# Altium PCB PCB1.PcbDoc
Units mm, origin at the board's own origin, x right, y up, seen from the top; angles counter-clockwise.
Board outline 59.82 x 65.23 mm, 2 copper layers (Top Layer, Bottom Layer); 87 components, 78 nets, 361 pads, 104 vias.
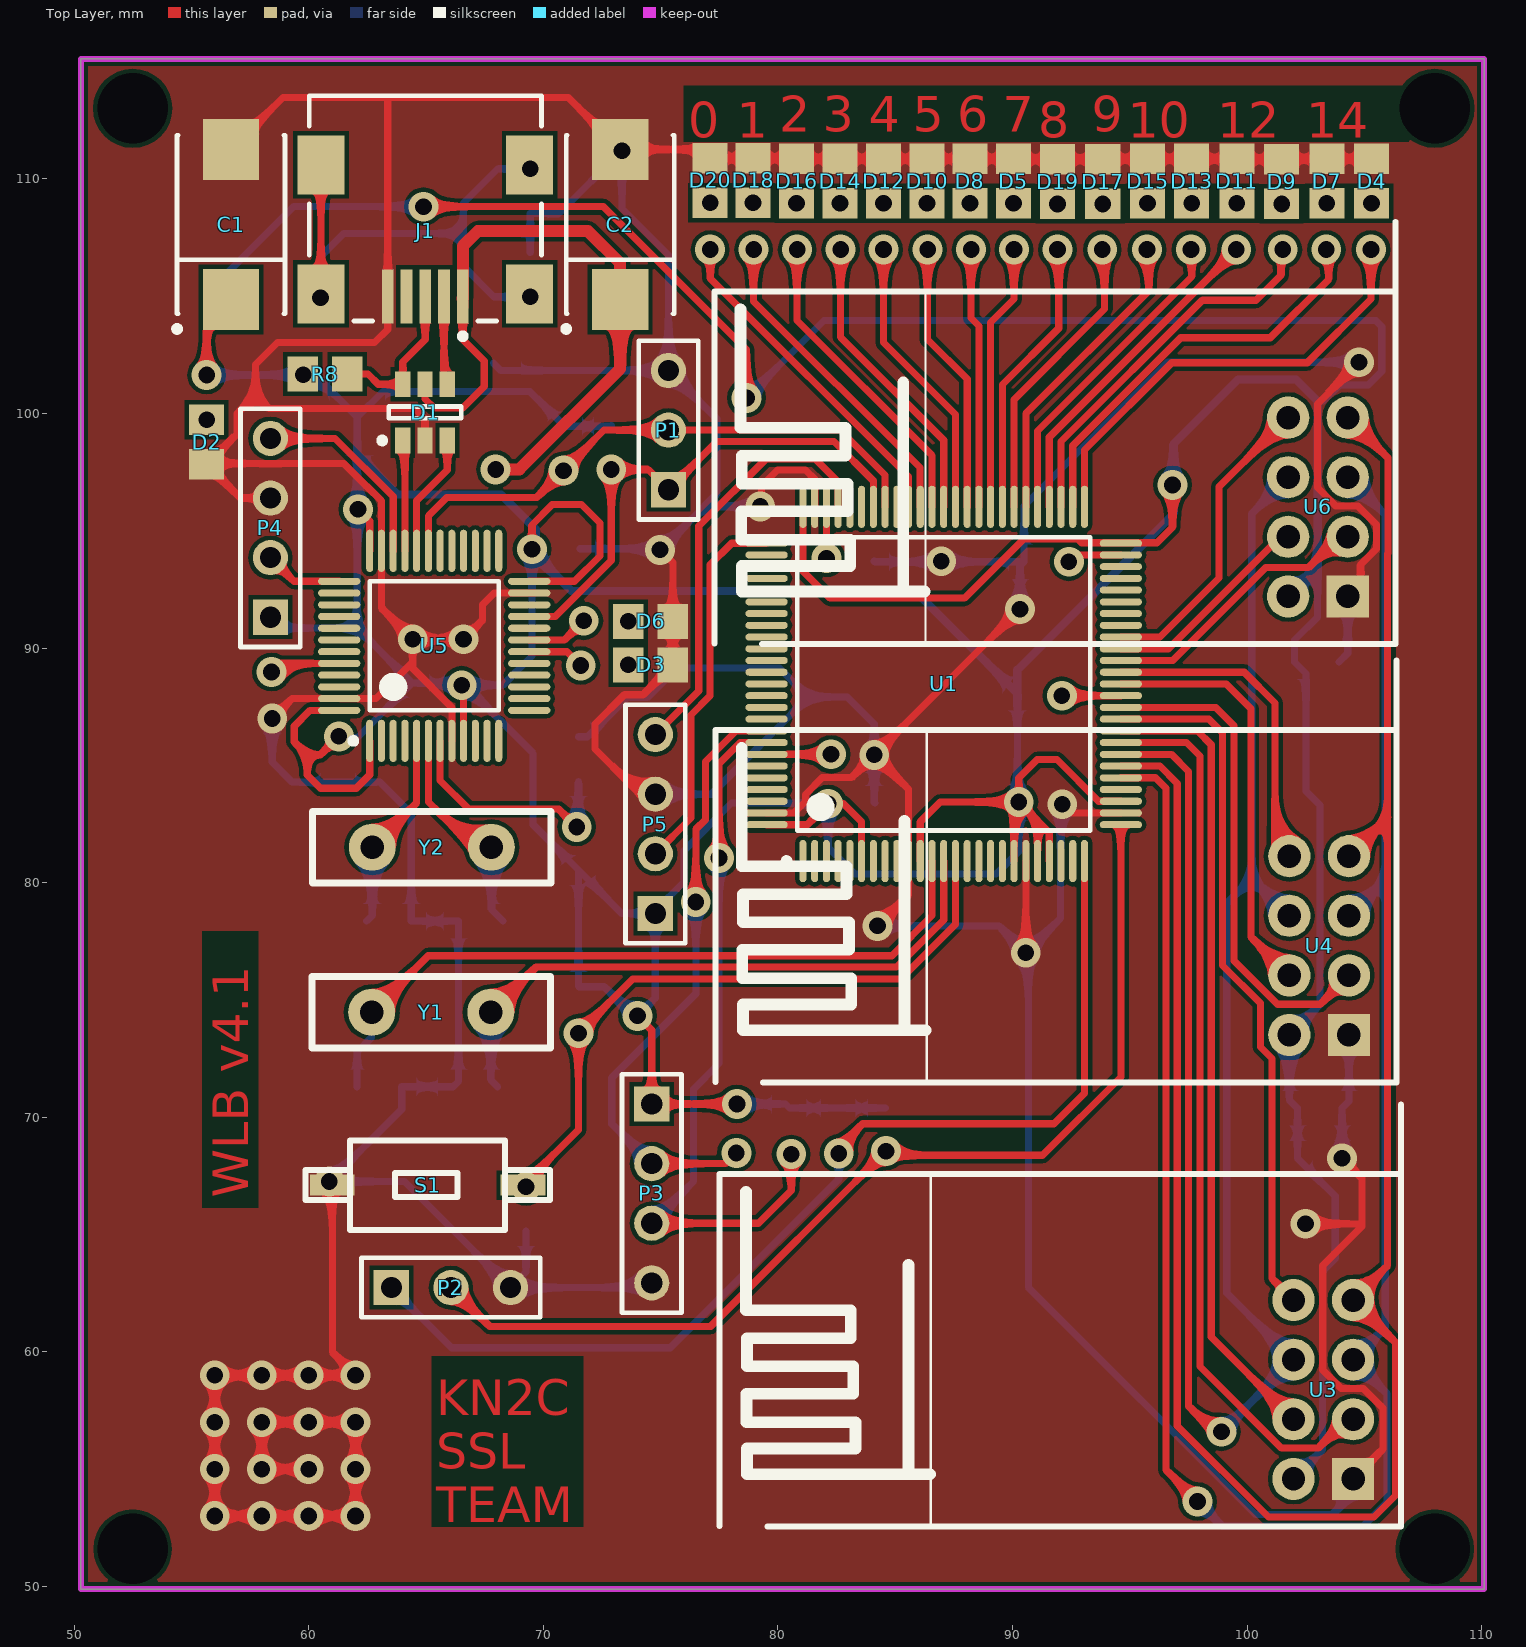
[diagram p0: Top Layer view]
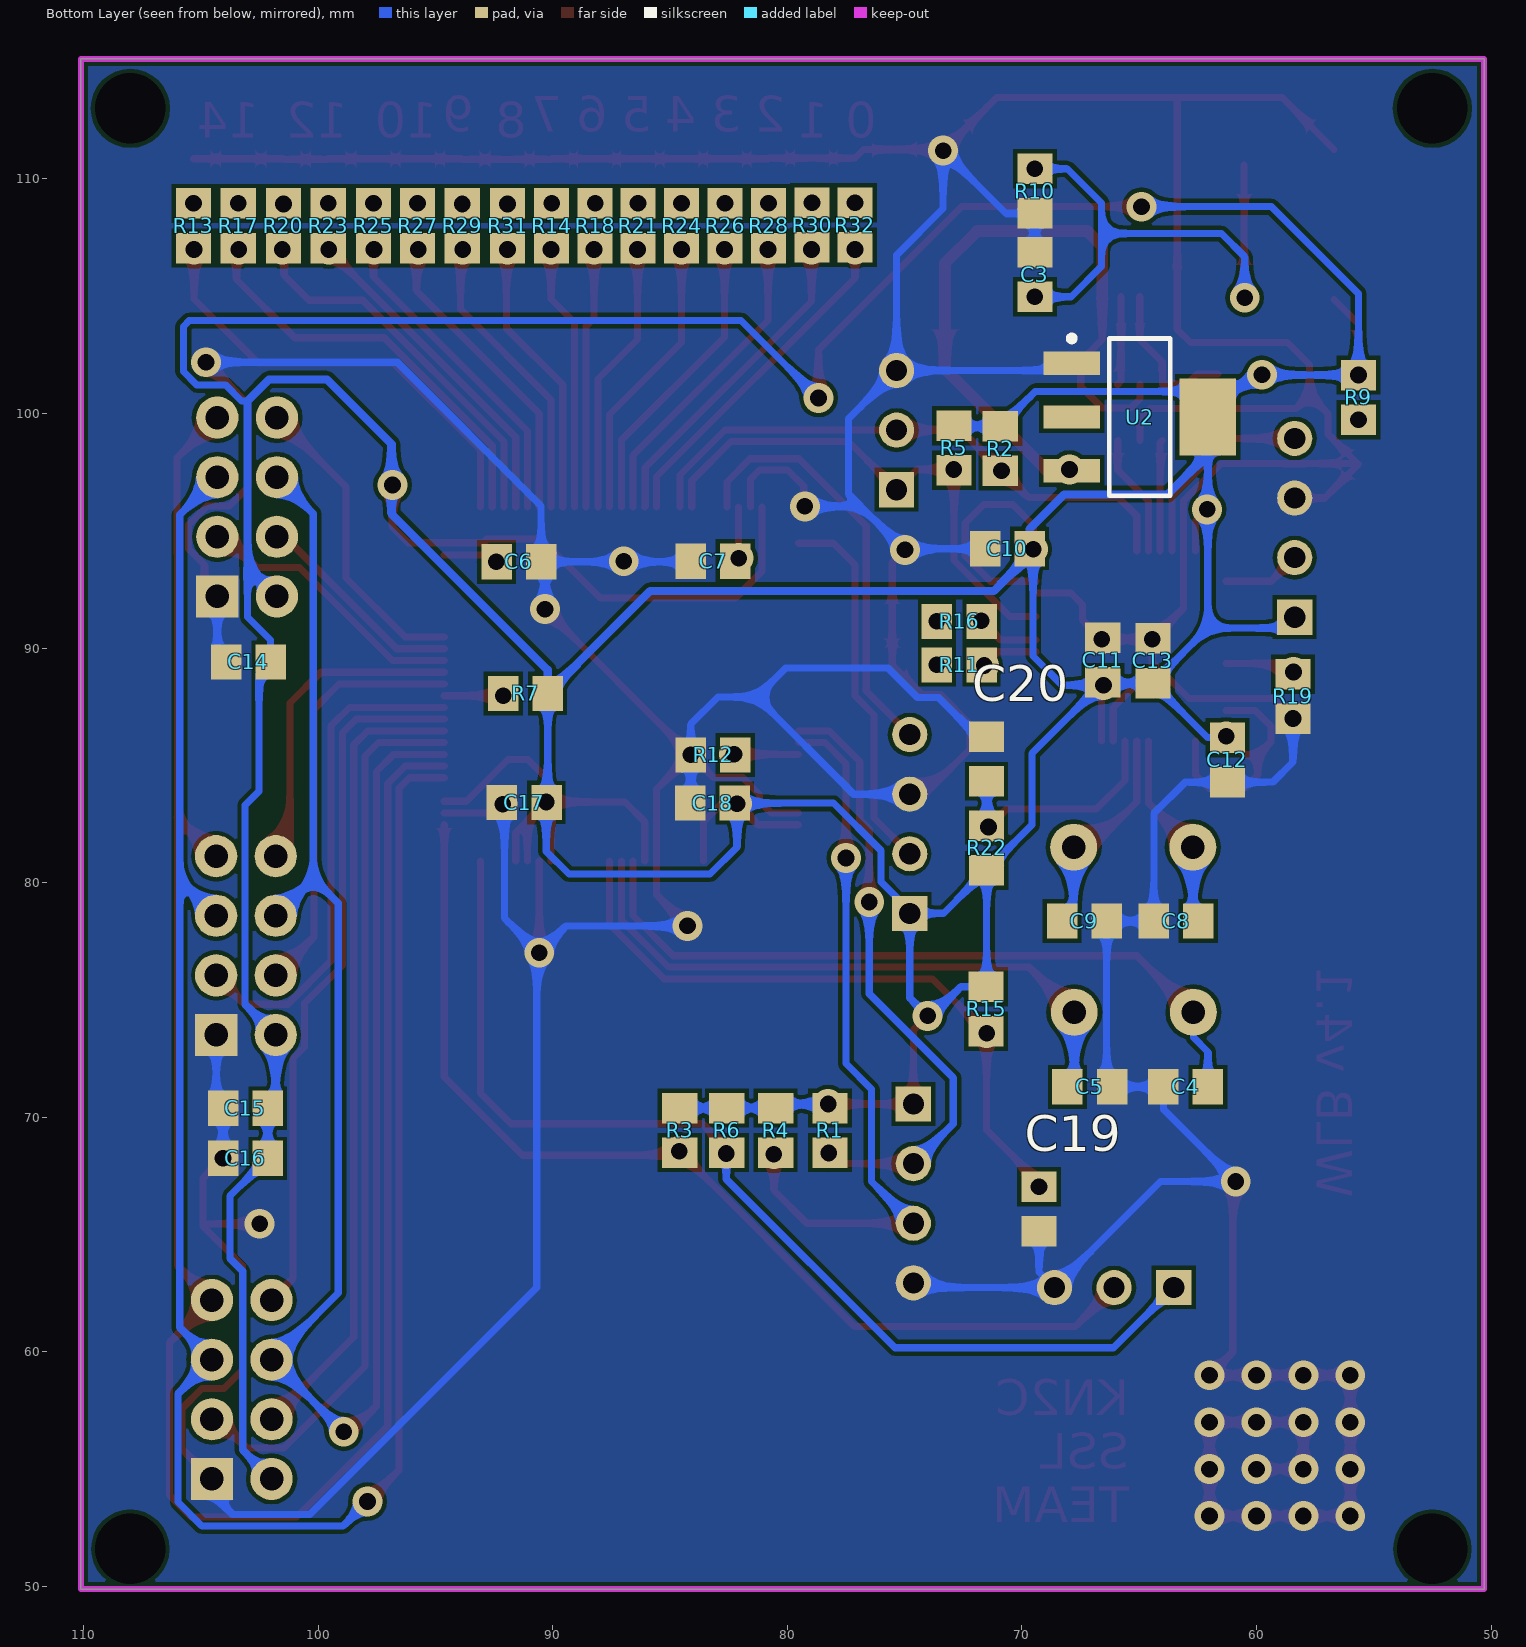
[diagram p1: Bottom Layer view, seen from below]

## Layer stack, top to bottom
Top Solder: solder mask 0.0102, Solder Resist, Dk 3.5
Top Layer: signal copper 0.0356
Dielectric 1: dielectric 0.32, FR-4, Dk 4.8
Bottom Layer: signal copper 0.0356
Bottom Solder: solder mask 0.0102, Solder Resist, Dk 3.5

## Board outline
50.292,49.886 110.109,49.886 110.109,115.113 50.292,115.113

## Design rules (kind name [scope] priority, off if disabled: settings)
Clearance [All] p1: gap=0.178
ComponentClearance [All] p1 off: gap=0.254 collisioncheckmode=3 verticalgap=0.254 showdistances=FALSE
Height [All] p1 off: minheight=0 maxheight=25.4 prefheight=12.7
PlaneConnect [All] p1: planeconnectstyle=Direct reliefexpansion=0.508 reliefentries=4 reliefconductorwidth=0.254 reliefairgap=0.254
PolygonConnect [All] p1: connectstyle=Direct reliefconductorwidth=0.254 reliefentries=4 polygonreliefangle="90 Angle" airgapwidth=0.254
RoutingVias [All] p1: holewidth=0.508 width=1.016 viastyle="Through Hole" minholewidth=0.406 minwidth=0.813 maxholewidth=0.508 maxwidth=1.016
SolderMaskExpansion [All] p1: expansion=0.102
Width [All] p1: maxlimit=0.508 minlimit=0.305 preferedwidth=0.305
27 further rules are at their usual default settings.

## Components (designator, comment, footprint, x,y, rotation, side; value= is the part's Value field where it differs from the comment)
C1 "Cap_El" 7343 56.693,108.052 r90 top
C2 "Cap_El" 7343 73.279,108.052 r90 top
C3 "Cap_UP" 2012[0805] 69.444,105.918 r270 bottom
C4 "Cap_UP" 2012[0805] 63.017,71.298 r0 bottom
C5 "Cap_UP" 2012[0805] 67.107,71.298 r180 bottom
C6 "Cap_UP" 2012[0805] 91.44,93.675 r0 bottom
C7 "Cap_UP" 2012[0805] 83.16,93.701 r180 bottom
C8 "Cap_UP" 2012[0805] 63.424,78.359 r0 bottom
C9 "Cap_UP" 2012[0805] 67.335,78.359 r180 bottom
C10 "Cap_UP" 2012[0805] 70.612,94.234 r180 bottom
C11 "Cap_UP" 2012[0805] 66.548,89.484 r270 bottom
C12 "Cap_UP" 2012[0805] 61.239,85.232 r90 bottom
C13 "Cap_UP" 2012[0805] 64.414,89.459 r270 bottom
C14 "Cap_UP" 2012[0805] 102.972,89.408 r180 bottom
C15 "Cap_UP" 2012[0805] 103.099,70.383 r180 bottom
C16 "Cap_UP" 2012[0805] 103.099,68.25 r180 bottom
C17 "Cap_UP" 2012[0805] 91.211,83.414 r180 bottom
C18 "Cap_UP" 2012[0805] 83.185,83.388 r180 bottom
C19 "Cap_UP" 2012[0805] 69.266,66.091 r90 bottom
C20 "Cap_UP" 2012[0805] 71.501,85.268 r270 bottom
D1 "PRTR5V0U2X" PRTR5V0U2D 64.999,100.051 r180 top
D2 "Diode" 2012[0805] 55.651,98.781 r270 top
D3 "Diode" 2012[0805] 74.574,89.281 r0 top
D4 "Diode" 2012[0805] 105.308,109.906 r90 top
D5 "Diode" 2012[0805] 90.043,109.906 r90 top
D6 "Diode" 2012[0805] 74.574,91.135 r0 top
D7 "Diode" 2012[0805] 103.403,109.906 r90 top
D8 "Diode" 2012[0805] 88.189,109.906 r90 top
D9 "Diode" 2012[0805] 101.473,109.88 r90 top
D10 "Diode" 2012[0805] 86.36,109.906 r90 top
D11 "Diode" 2012[0805] 99.568,109.906 r90 top
D12 "Diode" 2012[0805] 84.506,109.906 r90 top
D13 "Diode" 2012[0805] 97.638,109.906 r90 top
D14 "Diode" 2012[0805] 82.652,109.906 r90 top
D15 "Diode" 2012[0805] 95.758,109.906 r90 top
D16 "Diode" 2012[0805] 80.797,109.906 r90 top
D17 "Diode" 2012[0805] 93.853,109.88 r90 top
D18 "Diode" 2012[0805] 78.943,109.931 r90 top
D19 "Diode" 2012[0805] 91.923,109.88 r90 top
D20 "Diode" 2012[0805] 77.114,109.931 r90 top
J1 "USB_AB" USB_MINI 64.973,108.941 r180 top
P1 "Header 3" HDR1X3 75.336,96.749 r90 top
P2 "Header 3" HDR1X3 63.525,62.738 r0 top
P3 "Header 4" HDR1X4 74.625,70.561 r270 top
P4 "Header 4" HDR1X4 58.369,91.313 r90 top
P5 "Header 4" HDR1X4 74.778,78.689 r90 top
R1 "Res" 2012[0805] 78.181,69.444 r270 bottom
R2 "Res" 2012[0805] 70.917,98.501 r270 bottom
R3 "Res" 2012[0805] 84.582,69.444 r270 bottom
R4 "Res" 2012[0805] 80.493,69.444 r270 bottom
R5 "Res" 2012[0805] 72.898,98.527 r270 bottom
R6 "Res" 2012[0805] 82.575,69.444 r270 bottom
R7 "Res" 2012[0805] 91.161,88.062 r0 bottom
R8 "Res" 2012[0805] 60.696,101.676 r0 top
R9 "Res" 2012[0805] 55.651,100.686 r270 bottom
R10 "1M" 2012[0805] 69.444,109.474 r90 bottom
R11 "Res" 2012[0805] 72.669,89.281 r0 bottom
R12 "Res" 2012[0805] 83.16,85.446 r0 bottom
R13 "Res" 2012[0805] 105.308,108.001 r90 bottom
R14 "Res" 2012[0805] 90.043,108.001 r90 bottom
R15 "Res" 2012[0805] 71.526,74.615 r270 bottom
R16 "Res" 2012[0805] 72.669,91.135 r0 bottom
R17 "Res" 2012[0805] 103.403,108.001 r90 bottom
R18 "Res" 2012[0805] 88.189,108.001 r90 bottom
R19 "Res" 2012[0805] 58.445,87.935 r270 bottom
R20 "Res" 2012[0805] 101.473,108.001 r90 bottom
R21 "Res" 2012[0805] 86.36,108.001 r90 bottom
R22 "Res" 2012[0805] 71.501,81.483 r90 bottom
R23 "Res" 2012[0805] 99.568,108.001 r90 bottom
R24 "Res" 2012[0805] 84.506,108.001 r90 bottom
R25 "Res" 2012[0805] 97.638,108.001 r90 bottom
R26 "Res" 2012[0805] 82.652,108.001 r90 bottom
R27 "Res" 2012[0805] 95.758,108.001 r90 bottom
R28 "Res" 2012[0805] 80.797,108.001 r90 bottom
R29 "Res" 2012[0805] 93.853,108.001 r90 bottom
R30 "Res" 2012[0805] 78.943,108.026 r90 bottom
R31 "Res" 2012[0805] 91.923,108.001 r90 bottom
R32 "Res" 2012[0805] 77.114,108.026 r90 bottom
S1 "SW-SPST" SW-SMD 65.075,67.107 r180 top
U1 "STM32F407VGT6" STM-LQFP100_N 87.071,88.468 r90 top
U2 "LM1117DT-3.3" SOT223 64.973,99.847 r180 bottom
U3 "nrf24L01" NRF24L01 106.553,52.553 r180 top
U4 "nrf24L01" NRF24L01 106.375,71.476 r180 top
U5 "STM32F103CBT6" STM-LQFP48_N 65.354,90.094 r90 top
U6 "nrf24L01" NRF24L01 106.324,90.17 r180 top
Y1 "XTAL" XTALL 65.227,74.473 r270 top
Y2 "XTAL" XTALL 65.253,81.509 r90 top

## Footprints (in the part's own frame and the unit in brackets; to place one, negate y for a bottom-side part, rotate by r counter-clockwise, add the part's x,y. Pads: shape width x height; smd on the part's side, far side on the other; paste and mask are expansions set on the pad)
2012[0805] [mm] "Chip Resistor; Body 2.0 x 1.3 mm (LxW typ)"
  rect 1.3x1.5 smd: 1(-0.95,0) 2(0.95,0)
  body extent -1.22,-0.75 1.28,0.75, height 0.5
7343 [mm] "Capacitor, SM Tantalum; Body 7.3 x 4.3 mm (LxW typ)"
  rect 2.6x2.4 smd: 1(-3.2,0) 2(3.2,0)
  silkscreen extent -4.57,-2.3 3.8,2.42, body extent -3.9,-2.4 3.9,2.4, height 2
HDR1X3 [mm] "Connector; Header; 3 Position"
  rect 1.5x1.5 hole 0.9: 1(0,0)
  round 1.5 hole 0.9: 2(2.54,0) 3(5.08,0)
  silkscreen extent -1.27,-1.27 6.35,1.27
HDR1X4 [mm] "Connector; Header; 4 Position"
  rect 1.5x1.5 hole 0.9: 1(0,0)
  round 1.5 hole 0.9: 2(2.54,0) 3(5.08,0) 4(7.62,0)
  silkscreen extent -1.27,-1.27 8.89,1.27
NRF24L01 [mm]
  rect 1.8x1.8 hole 1: 1(2.032,-2.032)
  round 1.8 hole 1: 2(4.572,-2.032) 3(2.032,-4.572) 4(4.572,-4.572) 5(2.032,-7.112) 6(4.572,-7.112) 7(2.032,-9.652) 8(4.572,-9.652)
  silkscreen extent 0,-18 29.03,0
PRTR5V0U2D [mm]
  rect 0.65x1.1 smd: 1(0.987,1.204) 2(0.037,1.204) 3(-0.913,1.204) 4(-0.913,-1.196) 5(0.037,-1.196) 6(0.987,-1.196)
  silkscreen extent -1.51,-0.25 1.99,1.33, body extent -1.51,-0.9 1.59,0.9, height 1.1
SOT223 [mm] "SOT223, 4-Leads, Body 6.7x7.3mm (max), Pitch 2.30mm, IPC Medium Density"
  rect 2.4x1 smd: 1(-2.9,2.3) 2(-2.9,0) 3(-2.9,-2.3)
  rect 2.4x3.3 smd: 4(2.9,0)
  silkscreen extent -3.03,-3.35 1.3,3.47, body extent -1.85,-3.35 1.85,3.35, height 1.8
STM-LQFP48_N [mm] "QFP, 48-Leads, Body 7x7mm, Pitch 0.5mm, IPC Medium Density"
  oval 1.8x0.3 smd: 1(-4.05,2.75) 2(-4.05,2.25) 3(-4.05,1.75) 4(-4.05,1.25) 5(-4.05,0.75) 6(-4.05,0.25) 7(-4.05,-0.25) 8(-4.05,-0.75) 9(-4.05,-1.25) 10(-4.05,-1.75) 11(-4.05,-2.25) 12(-4.05,-2.75) 25(4.05,-2.75) 26(4.05,-2.25) 27(4.05,-1.75) 28(4.05,-1.25) 29(4.05,-0.75) 30(4.05,-0.25) 31(4.05,0.25) 32(4.05,0.75) 33(4.05,1.25) 34(4.05,1.75) 35(4.05,2.25) 36(4.05,2.75)
  oval 0.3x1.8 smd: 13(-2.75,-4.05) 14(-2.25,-4.05) 15(-1.75,-4.05) 16(-1.25,-4.05) 17(-0.75,-4.05) 18(-0.25,-4.05) 19(0.25,-4.05) 20(0.75,-4.05) 21(1.25,-4.05) 22(1.75,-4.05) 23(2.25,-4.05) 24(2.75,-4.05) 37(2.75,4.05) 38(2.25,4.05) 39(1.75,4.05) 40(1.25,4.05) 41(0.75,4.05) 42(0.25,4.05) 43(-0.25,4.05) 44(-0.75,4.05) 45(-1.25,4.05) 46(-1.75,4.05) 47(-2.25,4.05) 48(-2.75,4.05)
  silkscreen extent -4.17,-2.75 2.75,3.57, body extent -3.5,-3.5 3.5,3.5, height 1.6
STM-LQFP100_N [mm] "Thin QFP, 100-Leads, Body 14x14mm, Pitch 0.5mm, IPC Medium Density"
  oval 1.8x0.3 smd: 1(-7.55,6) 2(-7.55,5.5) 3(-7.55,5) 4(-7.55,4.5) 5(-7.55,4) 6(-7.55,3.5) 7(-7.55,3) 8(-7.55,2.5) 9(-7.55,2) 10(-7.55,1.5) 11(-7.55,1) 12(-7.55,0.5) 13(-7.55,0) 14(-7.55,-0.5) 15(-7.55,-1) 16(-7.55,-1.5) 17(-7.55,-2) 18(-7.55,-2.5) 19(-7.55,-3) 20(-7.55,-3.5) 21(-7.55,-4) 22(-7.55,-4.5) 23(-7.55,-5) 24(-7.55,-5.5) 25(-7.55,-6) 51(7.55,-6) 52(7.55,-5.5) 53(7.55,-5) 54(7.55,-4.5) 55(7.55,-4) 56(7.55,-3.5) 57(7.55,-3) 58(7.55,-2.5) 59(7.55,-2) 60(7.55,-1.5) 61(7.55,-1) 62(7.55,-0.5) 63(7.55,0) 64(7.55,0.5) 65(7.55,1) 66(7.55,1.5) 67(7.55,2) 68(7.55,2.5) 69(7.55,3) 70(7.55,3.5) 71(7.55,4) 72(7.55,4.5) 73(7.55,5) 74(7.55,5.5) 75(7.55,6)
  oval 0.3x1.8 smd: 26(-6,-7.55) 27(-5.5,-7.55) 28(-5,-7.55) 29(-4.5,-7.55) 30(-4,-7.55) 31(-3.5,-7.55) 32(-3,-7.55) 33(-2.5,-7.55) 34(-2,-7.55) 35(-1.5,-7.55) 36(-1,-7.55) 37(-0.5,-7.55) 38(0,-7.55) 39(0.5,-7.55) 40(1,-7.55) 41(1.5,-7.55) 42(2,-7.55) 43(2.5,-7.55) 44(3,-7.55) 45(3.5,-7.55) 46(4,-7.55) 47(4.5,-7.55) 48(5,-7.55) 49(5.5,-7.55) 50(6,-7.55) 76(6,7.55) 77(5.5,7.55) 78(5,7.55) 79(4.5,7.55) 80(4,7.55) 81(3.5,7.55) 82(3,7.55) 83(2.5,7.55) 84(2,7.55) 85(1.5,7.55) 86(1,7.55) 87(0.5,7.55) 88(0,7.55) 89(-0.5,7.55) 90(-1,7.55) 91(-1.5,7.55) 92(-2,7.55) 93(-2.5,7.55) 94(-3,7.55) 95(-3.5,7.55) 96(-4,7.55) 97(-4.5,7.55) 98(-5,7.55) 99(-5.5,7.55) 100(-6,7.55)
  silkscreen extent -7.67,-6.25 6.25,6.82, body extent -7,-7 7,7, height 1.6
SW-SMD [mil]
  rect 75x35 smd: 1(-160,0) 2(160,0)
  silkscreen extent -205,-75 205,75
USB_MINI [mm]
  rect 0.5x2.3 smd: 1(-1.6,3.95) 2(-0.8,3.95) 3(0,3.95) 4(0.8,3.95) 5(1.6,3.95)
  rect 2x2.5 smd: 6(4.45,3.85) 7(4.45,-1.65) 8(-4.45,3.85) 9(-4.45,-1.65)
  silkscreen extent -4.95,-4.6 4.95,5.77
XTALL [mm]
  round 2 hole 1: 1(0,-2.54) 2(0,2.54)
  silkscreen extent -1.52,-5.08 1.52,5.08

## Part data
C1 C2 C3 C4 C5 C6 C7 C8 C9 C10 C11 C12 C13 C14 C15 C16 C17 C18 C19 C20: "Capacitor"
D1: "Double rail-to-rail USB ESD protection diode"
D2 D3 D4 D5 D6 D7 D8 D9 D10 D11 D12 D13 D14 D15 D16 D17 D18 D19 D20: "1 Amp General Purpose Rectifier"
J1: "Micro USB AB Connector"
P1 P2: "Header, 3-Pin"
P3 P4 P5: "Header, 4-Pin"
R1 R2 R3 R4 R5 R6 R7 R8 R9 R11 R12 R13 R14 R15 R16 R17 R18 R19 R20 R21 R22 R23 R24 R25 R26 R27 R28 R29 R30 R31 R32: "Semiconductor Resistor"
R10: library part Res, "Semiconductor Resistor"
S1: "Single-Pole, Single-Throw Switch"
U1: "ARM Cortex-M4 32-bit MCU+FPU, 210 DMIPS, 1024 kB Flash, 192 kB Internal RAM, 82 I/Os, 100-pin LQFP, -40 to 85 degC, Tray"
U2: "800mA Low-Dropout Linear Regulator, 3-pin TO-252"
U5: "ARM Cortex-M3 32-bit MCU, 128 KB Flash, 20 KB Internal RAM, 37 I/Os, 48-pin LQFP, -40 to 85 degC, Tray"
Y1 Y2: "Crystal Oscillator"

## Free pads (board coordinates)
  round 1.524 hole 3: 0(108,113) 1(108,51.6) 2(52.5,113) 3(52.5,51.6)

## Via types
v1: diameter 1.27, hole 0.711, Top Layer to Bottom Layer, 104 vias

## Nets (pads, with @x,y where several pads share a name; then routed paths per layer and width w, separated by ;. In a path a pad name is that pad's centre, name@x,y a point inside that pad or via, vN(x,y) a via of type N, cw(c..) or ccw(c..) an arc to the next point about the centre after c; other vN are vias at no path point)
3.3V: C1.1 C10.2 C11.2 C12.2 C13.2 C14.2 C15.2 C16.2 C17.2 C18.2 P3.1 P4.1 P5.1 R1.1 R2.1 R3.1 R4.1 R5.1 R6.1 R7.1 R8.1 R9.1 R15.1 R22.1 U1.6 U1.11 U1.19 U1.21 U1.22 U1.28 U1.50 U1.75 U1.100 U2.4 U3.2 U4.2 U5.1 U5.9 U5.24 U5.36 U5.48 U6.2 | length 366.3
  Top Layer w0.305: v1(55.651,101.636) 55.651,103.81 C1.1 ; v1(61.29,86.233) 60.503,85.446 59.944,85.446 ; U5.48 60.064,87.344 59.385,86.665 59.385,86.004 59.944,85.446 ; v1(62.103,95.91) 62.604,95.409 U5.36 ; U5.1 62.604,84.601 62.027,84.023 60.503,84.023 59.944,84.582 59.944,85.446 ; v1(64.897,108.814) 72.568,108.814 78.664,102.718 v1(78.664,100.66) ; v1(66.523,88.417) 66.604,88.336 U5.9 ; U5.24 71.333,92.844 72.415,93.926 72.415,95.326 71.628,96.114 70.383,96.114 69.52,95.25 v1(69.52,94.209) ; v1(74.016,74.32) 74.625,73.711 P3.1 v1(78.257,70.561) ; U1.100 81.249,82.468 v1(82.144,83.363) 82.804,83.363 83.571,82.596 U1.6 ; U1.75 81.071,93.274 82.22,92.126 87.96,92.126 90.475,94.64 92.805,94.64 92.957,94.488 96.164,94.488 96.825,95.148 v1(96.825,96.952) ; U1.11 86.071,82.591 86.919,83.439 v1(90.272,83.439) ; U1.19 90.071,83.239 v1(90.272,83.439) ; U1.21 91.071,82.639 ; U1.22 91.571,82.139 91.071,82.639 ; U1.28 93.671,83.468 91.897,85.242 91.059,85.242 90.272,84.455 v1(90.272,83.439) ; v1(90.272,83.439) 91.071,82.639
  Bottom Layer w0.305: P4.1 58.832,90.85 62.073,90.85 ; C12.2 62.088,86.182 C13.2 ; v1(64.897,108.814) 59.36,108.814 55.651,105.105 v1(55.651,101.636) 60.285,101.636 U2.4 ; v1(66.523,88.417) C11.2@66.665,88.417 ; v1(69.52,94.209) 69.52,89.662 68.275,88.417 C11.2@66.665,88.417 ; R5.1 72.873,99.451 R2.1 69.428,100.94 63.165,100.94 U2.4 ; v1(78.257,70.561) 80.325,70.561 R4.1 R6.1 R3.1 ; v1(78.664,100.66) 81.966,103.962 105.486,103.962 105.74,103.708 105.74,101.784 105.175,101.219 103.95,101.219 103.261,100.531 103.01,100.531 ; v1(82.144,83.363) 82.144,81.509 83.287,80.366 89.306,80.366 90.272,81.331 v1(90.272,83.439) ; C18.2 78.029,83.388 75.997,81.356 75.997,80.029 74.778,78.81 P5.1 ; R7.1 90.211,83.464 C17.2 ; U3.2 103.211,55.815 103.211,63.438 103.759,63.986 103.759,66.639 C16.2 C15.2 101.803,70.729 U4.2 103.113,74.817 103.113,83.298 102.514,83.896 102.514,88.915 C14.2 102.022,90.338 103.01,91.326 103.01,93.459 ; 62.073,90.85 C13.2 ; 62.073,90.85 62.073,98.262 U2.4 ; C13.2 66.523,88.509 C11.2 C11.2@66.665,88.417 ; C11.2@66.665,88.417 69.571,85.512 69.571,82.464 R22.1 ; R22.1 73.345,78.689 P5.1 ; R22.1 71.501,75.59 R15.1 72.593,75.565 73.838,74.32 v1(74.016,74.32) 74.778,75.082 P5.1
  Bottom Layer w0.356: U2.4@62.073,98.262 63.79,96.545 68.199,96.545 69.675,95.07 69.675,94.247 C10.2 69.662,93.965 71.196,92.431 85.842,92.431 R7.1 90.211,89.068 96.863,95.72 96.863,98.692 99.619,101.448 102.093,101.448 103.01,100.531 103.01,93.459 U6.2
  other v1: 59.766,101.651
5V: C2.1 D1.5 J1.1 U2.3 | length 29.2
  Top Layer w0.305: D1.5 64.962,100.621 65.354,100.228 66.573,100.228 67.488,101.143 67.488,102.235 66.573,103.15 J1.1
  Top Layer w0.508: J1.1 66.573,107.137 67.208,107.772 71.907,107.772 73.279,106.401 C2.1 73.279,101.905 68.986,97.612 v1(67.97,97.612)
CE1: U1.33 U3.3 | length 38.1
  Top Layer w0.305: U1.33 97.42,85.968 97.993,85.395 97.993,59.373 101.471,55.894 103.033,55.894 104.264,57.125 U3.3
CE2: U1.36 U4.3 | length 21.3
  Top Layer w0.305: U1.36 98.663,87.468 99.441,86.69 99.441,76.67 101.294,74.817 103.113,74.817 U4.3
CE3: U1.40 U6.3 | length 11.9
  Top Layer w0.305: U1.40 96.831,89.468 100.795,93.432 102.627,93.432 103.937,94.742 U6.3
CS1: U1.34 U3.4 | length 34.3
  Top Layer w0.305: U1.34 97.885,86.468 98.476,85.877 98.476,60.63 U3.4
CS2: U1.38 U4.4 | length 18
  Top Layer w0.305: U1.38 99.111,88.468 100.165,87.414 100.165,77.686 U4.4
CS3: U1.41 U6.4 | length 9.1
  Top Layer w0.305: U1.41 96.648,89.968 101.422,94.742 U6.4
"DEBUG RX": P2.2 R3.2 U1.26 | length 44.6
  Top Layer w0.305: P2.2 67.716,61.087 77.14,61.087 v1(84.607,68.555) ; v1@84.506,68.377 91.288,68.377 94.621,71.71 U1.26
"DEBUG TX": P2.1 R6.2 U1.25 | length 45.6
  Top Layer w0.305: v1@82.525,68.631 83.617,69.723 91.77,69.723 93.071,71.024 U1.25
  Bottom Layer w0.305: P2.1 66.091,60.173 75.413,60.173 82.601,67.361 v1(82.601,68.453)
DM: D1.3 U5.32 | length 5.2
  Top Layer w0.305: U5.32 64.604,96.278 65.912,97.585 D1.3
DP: D1.1 U5.33 | length 4.7
  Top Layer w0.305: D1.1 64.104,98.754 U5.33
GND: C1.2 C2.2 C3.1 C4.2 C5.2 C6.1 C7.1 C8.2 C9.2 C10.1 C11.1 C12.1 C13.1 C14.1 C15.1 C16.1 C17.1 C18.1 C19.1 C20.1 D1.2 D2.2 D3.2 D4.2 D5.2 D6.2 D7.2 D8.2 D9.2 D10.2 D11.2 D12.2 D13.2 D14.2 D15.2 D16.2 D17.2 D18.2 D19.2 D20.2 J1.5 P1.3 P2.3 P3.4 P4.3 P5.3 R10.1 R12.2 R19.2 S1.2 U1.10 U1.20 U1.27 U1.74 U1.99 U2.1 U3.1 U4.1 U5.8 U5.23 U5.35 U5.47 U6.1 | length 433.2
  Top Layer w0.305: C1.2 58.903,113.462 63.424,113.462 ; P4.3 57.089,96.393 D2.2 D2.2@55.687,97.866 ; v1(58.445,86.995) 59.294,87.844 U5.47 62.876,87.844 64.44,89.408 ; v1(60,55) v1(58,55) v1(58,57) v1(60,57) v1(62,57) v1(62,55) v1(62,53) v1(60,53) v1(58,53) v1(56,53) v1(56,55) v1(56,57) v1(56,59) v1(58,59) v1(60,59) v1(62,59) 61.011,59.989 S1.2 ; D1.2 64.962,99.783 64.541,100.203 58.318,100.203 57.734,100.787 ; U5.8 66.104,87.471 64.44,89.135 64.44,89.408 ; U5.23 67.909,92.344 67.412,91.846 67.412,91.186 v1(66.599,90.373) v1(64.44,90.373) ; P5.3 74.143,83.769 72.212,85.7 72.212,86.766 73.457,88.011 74.254,88.011 D3.2 D6.2 75.524,93.64 v1(74.981,94.183) ; v1@79.299,95.733 79.299,96.901 79.985,97.587 81.18,97.587 81.571,97.196 U1.74 ; U1.99 80.682,82.968 81.178,83.464 81.178,83.763 81.896,84.48 83.144,84.48 v1(84.11,85.446) ; v1(84.252,78.156) 85.571,79.475 U1.10 85.571,83.984 v1(84.11,85.446) ; v1(90.322,91.658) v1(84.11,85.446) ; v1(90.571,77.008) U1.20 ; v1(92.126,83.337) 92.495,82.968 U1.27 ; v1(102.489,65.456) 104.8,65.456 104.902,65.354 ; v1(104.049,68.25) 104.902,67.396 104.902,65.354 ; U6.1 104.837,92.746 104.837,93.547 105.523,94.232 105.523,95.252 104.722,96.052 103.783,96.052 102.997,96.838 102.997,100.406 v1(104.775,102.184) ; U3.1 105.791,55.855 105.791,57.594 104.951,58.434 104.011,58.434 103.226,59.22 103.226,63.678 104.902,65.354 ; D4.2 D7.2 101.498,110.856 D9.2 99.593,110.83 D11.2 D13.2 D15.2 93.878,110.856 D17.2 D19.2 90.068,110.83 D5.2 D8.2 D10.2 D12.2 D14.2 D16.2 80.772,110.881 D18.2 D20.2 76.744,111.252 C2.2 71.069,113.462 63.424,113.462 ; D2.2@55.687,97.866 57.908,97.866 57.922,97.853 58.817,97.853 58.83,97.866 61.497,97.866 62.487,96.876 62.503,96.876 63.104,96.274 U5.35 63.104,91.709 v1(64.44,90.373) ; D2.2@55.687,97.866 56.947,99.126 56.947,100 57.734,100.787 ; 57.734,100.787 57.734,102.083 58.674,103.022 62.814,103.022 63.373,103.581 J1.5 63.373,113.411 63.424,113.462 ; 64.44,89.408 v1(64.44,90.373)
  Bottom Layer w0.305: v1(58.445,86.995) R19.2 58.445,85.141 59.304,84.282 C12.1 63.038,84.282 64.374,82.946 C8.2 C9.2 66.385,71.526 C5.2 C4.2 63.967,70.343 v1(60.884,67.259) 64.084,67.259 P2.3 ; U2.1 68.192,101.829 P1.3 ; C19.1 69.266,63.398 P2.3 ; C3.1 R10.1 70.678,108.524 v1(73.355,111.201) 73.355,108.737 75.336,106.756 P1.3 ; C20.1 71.892,86.218 73.558,87.884 74.447,87.884 75.717,89.154 80.061,89.154 81.305,87.909 ; C10.1 75.057,94.234 76.86,96.037 ; P3.4 74.422,62.738 P2.3 ; P5.3 77.165,83.769 81.305,87.909 ; v1(79.248,96.037) 76.86,96.037 ; C7.1 84.135,93.675 C6.1 ; C18.1 84.11,83.414 v1(84.11,85.446) 84.11,86.756 82.956,87.909 81.305,87.909 ; v1(84.252,78.156) 89.423,78.156 v1(90.571,77.008) ; v1(90.322,91.658) 90.322,93.508 C6.1 ; v1(92.126,83.337) 92.05,83.261 92.05,78.486 v1(90.571,77.008) ; C14.1 104.292,89.779 U6.1 ; v1(104.049,68.25) C15.1 104.343,70.678 U4.1 ; U3.1 104.521,53.95 103.632,53.061 100.355,53.061 90.678,62.738 90.678,76.901 v1(90.571,77.008) ; v1(104.775,102.184) 96.622,102.184 90.49,96.053 C6.1 ; P1.3 77.394,99.771 77.394,96.571 76.86,96.037
  other v1: 86.97,93.701
IRQ1: U1.35 U3.8 | length 30
  Top Layer w0.305: U1.35 98.376,86.968 98.958,86.385 98.958,76.47 100.573,74.856 100.573,72.998 101.067,72.504 101.067,63.119 U3.8
IRQ2: U1.39 U4.8 | length 13.9
  Top Layer w0.305: U1.39 99.881,88.968 101.194,87.655 101.194,81.737 U4.8
IRQ3: U1.42 U6.8 | length 13.3
  Top Layer w0.305: U1.42 96.285,90.468 98.806,92.989 98.806,96.876 U6.8
LED1: R11.1 U5.18 | length 2.4
  Top Layer w0.305: U5.18 71.014,89.844 v1(71.603,89.256)
LED2: R16.1 U5.19 | length 2.7
  Top Layer w0.305: U5.19 70.913,90.344 v1(71.73,91.161)
MISO: U1.31 U3.7 U4.7 U6.7 | length 91.7
  Top Layer w0.305: U1.31 96.286,84.968 97.028,84.226 97.028,56.845 100.914,52.959 105.41,52.959 106.324,53.873 106.324,60.401 U3.7 105.994,63.678 105.994,82.779 ; U6.7 106.005,98.109 106.005,94.033 105.994,94.022 105.994,82.779 ; U4.7 105.994,82.779
MOSI: U1.32 U3.6 U4.6 U6.6 | length 78.6
  Top Layer w0.305: U1.32 96.777,85.468 97.511,84.734 97.511,57.683 98.603,56.591 v1(98.908,56.591)
  Bottom Layer w0.305: v1(98.908,56.591) U3.6 99.136,62.509 99.136,79.121 100.203,80.188 ; U6.6 100.203,95.733 100.203,80.188 ; U4.6 100.203,80.188
NetC3_2: C3.2 J1.6 J1.7 J1.8 J1.9 R10.2 | length 23.3
  Top Layer w0.305: J1.6 J1.7
  Bottom Layer w0.305: v1(60.503,104.927) 60.503,106.68 61.493,107.671 66.599,107.671 ; v1(69.444,104.968) 67.904,104.968 66.599,106.274 66.599,107.671 ; v1(69.444,110.424) 68.057,110.424 66.599,108.966 66.599,107.671
NetC4_1: C4.1 U1.12 Y1.1 | length 31.3
  Top Layer w0.305: Y1.1 65.1,76.886 84.861,76.886 86.571,78.596 U1.12
  Bottom Layer w0.305: C4.1 62.067,72.786 62.687,73.406 Y1.1
NetC5_1: C5.1 U1.13 Y1.2 | length 26.7
  Top Layer w0.305: Y1.2 69.698,76.403 85.065,76.403 87.071,78.41 U1.13
  Bottom Layer w0.305: Y1.2 67.767,71.587 C5.1
NetC6_2: C6.2 U1.49 | length 2.7
  Top Layer w0.305: v1@92.126,93.968 U1.49 ; v1@92.304,93.574 92.354,93.574 92.419,93.638 92.405,93.652 v1(92.405,93.675)
NetC7_2: C7.2 U1.73 | length 2.2
  Top Layer w0.305: v1(82.071,93.831) U1.73
NetC8_1: C8.1 U5.5 Y2.2 | length 8.6
  Top Layer w0.305: Y2.2 64.604,83.4 U5.5
  Bottom Layer w0.305: C8.1 62.713,78.598 Y2.2
NetC9_1: C9.1 U5.6 Y2.1 | length 9.4
  Top Layer w0.305: U5.6 65.104,83.435 67.031,81.509 Y2.1
  Bottom Layer w0.305: Y2.1 67.793,78.852 C9.1
NetC19_2: C19.2 R15.2 S1.1 U1.14 | length 28.1
  Top Layer w0.305: S1.1 71.501,69.469 v1(71.501,73.584) 73.812,75.895 85.242,75.895 87.571,78.224 U1.14
  other v1: 69.266,67.041
NetC20_2: C20.2 R22.2 U5.7 | length 10.3
  Top Layer w0.305: U5.7 65.604,84.357 66.827,83.134 70.663,83.134 v1(71.425,82.372)
  Bottom Layer w0.305: v1(71.425,82.372) 71.501,82.448 C20.2
NetD1_4: D1.4 J1.2 | length 3.8
  Top Layer w0.305: J1.2 65.773,101.385 D1.4
NetD1_6: D1.6 J1.3 R8.2 | length 6.7
  Top Layer w0.305: R8.2 62.535,101.676 62.964,101.247 D1.6 64.012,102.188 64.973,103.149 J1.3
NetD2_1: D2.1 R9.2
  other v1: 55.651,99.731
NetD3_1: D3.1 R11.2
  other v1: 73.624,89.281
NetD4_1: D4.1 R13.2
  other v1: 105.308,108.956
NetD5_1: D5.1 R14.2
  other v1: 90.043,108.956
NetD6_1: D6.1 R16.2
  other v1: 73.624,91.135
NetD7_1: D7.1 R17.2
  other v1: 103.403,108.956
NetD8_1: D8.1 R18.2
  other v1: 88.189,108.956
NetD9_1: D9.1 R20.2
  other v1: 101.473,108.93
NetD10_1: D10.1 R21.2
  other v1: 86.36,108.956
NetD11_1: D11.1 R23.2
  other v1: 99.568,108.956
NetD12_1: D12.1 R24.2
  other v1: 84.506,108.956
NetD13_1: D13.1 R25.2
  other v1: 97.638,108.956
NetD14_1: D14.1 R26.2
  other v1: 82.652,108.956
NetD15_1: D15.1 R27.2
  other v1: 95.758,108.956
NetD16_1: D16.1 R28.2
  other v1: 80.797,108.956
NetD17_1: D17.1 R29.2
  other v1: 93.853,108.93
NetD18_1: D18.1 R30.2
  other v1: 78.943,108.981
NetD19_1: D19.1 R31.2
  other v1: 91.923,108.93
NetD20_1: D20.1 R32.2
  other v1: 77.114,108.981
NetR7_2: R7.2 U1.37 | length 2.6
  Top Layer w0.305: v1@92.075,87.935 v1(92.108,87.968) U1.37
NetR12_1: R12.1 U1.94 | length 2.8
  Top Layer w0.305: U1.94 v1(82.268,85.468) v1@82.271,85.471
NetR19_1: R19.1 U5.44 | length 3.2
  Top Layer w0.305: v1@58.344,88.773 58.915,89.344 U5.44
  other v1: 58.42,88.976
RID0: R13.1 U1.51 | length 19.4
  Top Layer w0.305: U1.51 93.071,98.437 96.793,102.159 102.565,102.159 105.283,104.877 v1(105.283,106.985)
RID1: R17.1 U1.52 | length 17.8
  Top Layer w0.305: U1.52 92.571,98.62 97.177,103.226 100.99,103.226 103.48,105.715 103.48,106.883 v1(103.378,106.985)
RID2: R20.1 U1.53 | length 16.2
  Top Layer w0.305: U1.53 92.075,96.022 92.075,98.806 98.095,104.826 100.381,104.826 101.448,105.893 101.448,106.909 v1(101.524,106.985)
RID3: R23.1 U1.54 | length 14.3
  Top Layer w0.305: U1.54 91.571,98.988 99.543,106.959 v1(99.543,106.985)
RID4: R25.1 U1.55 | length 13.7
  Top Layer w0.305: U1.55 91.071,99.25 97.638,105.816 97.638,106.959 v1(97.612,106.985)
RID5: R27.1 U1.56 | length 13.2
  Top Layer w0.305: U1.56 90.571,99.995 95.809,105.232 95.809,106.909 v1(95.733,106.985)
RID6: R29.1 U1.57 | length 12.6
  Top Layer w0.305: U1.57 90.071,100.587 93.929,104.445 93.929,106.883 v1(93.828,106.985)
RID7: R31.1 U1.58 | length 12
  Top Layer w0.305: U1.58 89.571,101.23 91.973,103.632 91.973,106.934 v1(91.923,106.985)
RID8: R14.1 U1.59 | length 11.4
  Top Layer w0.305: U1.59 89.071,103.879 90.068,104.877 v1(90.068,106.985)
RID9: R18.1 U1.60 | length 11.1
  Top Layer w0.305: v1(88.24,106.985) 88.24,104.064 88.571,103.732 U1.60
RID10: R21.1 U1.61 | length 11.7
  Top Layer w0.305: v1(86.385,106.985) 86.385,103.149 88.071,101.464 U1.61
RID11: R24.1 U1.62 | length 12.2
  Top Layer w0.305: v1(84.506,106.985) 84.506,103.022 87.571,99.957 U1.62
RID12: R26.1 U1.63 | length 12.8
  Top Layer w0.305: v1(82.677,106.985) 82.677,103.251 87.071,98.857 U1.63
RID13: R28.1 U1.64 | length 13.3
  Top Layer w0.305: v1(80.823,106.985) 80.823,103.962 86.571,98.214 U1.64
RID14: R30.1 U1.65 | length 13.9
  Top Layer w0.305: v1(78.969,106.985) 78.969,104.775 86.054,97.69 86.054,96.036 U1.65
RID15: R32.1 U1.66 | length 14.5
  Top Layer w0.305: v1(77.114,106.985) 77.114,105.766 85.571,97.309 U1.66
RX: P1.2 R2.2 U1.68 U5.31 | length 24.6
  Top Layer w0.305: U5.31 65.104,95.635 65.888,96.418 69.723,96.418 v1(70.866,97.561) 72.593,99.289 P1.2 82.652,99.289 84.571,97.369 U1.68
SCK: U1.30 U3.5 U4.5 U6.5 | length 89.7
  Top Layer w0.305: U1.30 96.1,84.468 96.545,84.023 96.545,54.966 v1(97.892,53.619)
  Bottom Layer w0.305: v1(97.892,53.619) 98.933,52.578 104.953,52.578 105.969,53.594 105.969,58.217 U3.5 105.893,61.036 105.893,80.137 ; U6.5 105.893,95.682 105.893,80.137 ; U4.5 105.893,80.137
SCL: P3.2 R1.2 U1.92 | length 26.4
  Top Layer w0.305: P3.2 77.775,68.021 v1(78.232,68.478) ; v1(76.505,79.172) 76.505,82.274 76.911,82.68 76.911,85.166 78.213,86.468 U1.92
  Bottom Layer w0.305: P3.2 72.923,69.723 72.923,71.679 76.505,75.26 v1(76.505,79.172)
SDA: P3.3 R4.2 U1.93 | length 31.2
  Top Layer w0.305: P3.3 79.172,65.481 80.569,66.878 v1(80.569,68.428) ; v1(77.495,81.051) 77.495,85.068 78.396,85.968 U1.93
  Bottom Layer w0.305: P3.3 76.403,67.259 76.403,71.196 77.495,72.288 v1(77.495,81.051)
SWCLK1: P4.2 U5.37 | length 3.4
  Top Layer w0.305: P4.2 59.378,92.844 U5.37
SWCLK2: P5.2 U1.76 | length 16.1
  Top Layer w0.305: P5.2 76.302,82.753 76.302,87.151 77.114,87.964 77.114,93.548 78.034,94.468 U1.76
SWDIO1: P4.4 U5.34 | length 8.6
  Top Layer w0.305: P4.4 61.128,98.933 63.604,96.457 U5.34
SWDIO2: P5.4 U1.72 | length 18.3
  Top Layer w0.305: P5.4 76.632,88.163 76.632,95.199 79.502,98.069 81.585,98.069 82.571,97.083 U1.72
TX: P1.1 R5.2 U1.69 U5.21 | length 22.6
  Top Layer w0.305: U5.21 70.516,91.344 72.898,93.726 v1(72.898,97.612) 74.473,97.612 P1.1 77.394,98.806 82.398,98.806 84.071,97.132 U1.69
pads on no net: J1.4 U1.1 U1.2 U1.3 U1.4 U1.5 U1.7 U1.8 U1.9 U1.15 U1.16 U1.17 U1.18 U1.23 U1.24 U1.29 U1.43 U1.44 U1.45 U1.46 U1.47 U1.48 U1.67 U1.70 U1.71 U1.77 U1.78 U1.79 U1.80 U1.81 U1.82 U1.83 U1.84 U1.85 U1.86 U1.87 U1.88 U1.89 U1.90 U1.91 U1.95 U1.96 U1.97 U1.98 U2.2 U5.2 U5.3 U5.4 U5.10 U5.11 U5.12 U5.13 U5.14 U5.15 U5.16 U5.17 U5.20 U5.22 U5.25 U5.26 U5.27 U5.28 U5.29 U5.30 U5.38 U5.39 U5.40 U5.41 U5.42 U5.43 U5.45 U5.46

## Polygon pours and split planes (outlines as drawn)
GND on Top Layer "GND_L01_P016" (solid, remove dead copper, pour order 16): 50.14,115.316 50.394,115.062 110.109,115.062 110.109,49.936 110.058,49.886 50.317,49.886 50.317,114.859 50.571,115.113
GND on Bottom Layer "GND_L02_P018" (solid, remove dead copper, pour order 18): 50.267,115.265 110.033,115.265 110.033,50.013 109.906,49.886 109.779,50.013 50.14,50.013 50.14,114.884 50.368,115.113

## Keep-outs
Keep-Out Layer:
  the board outline again, w0.254

## Other copper
Top Layer:
  text "2" at 80.061,112.014 h1.52
  text "3" at 81.915,112.014 h1.52
  text "4" at 83.871,112.014 h1.52
  text "5" at 85.75,112.014 h1.52
  text "6" at 87.655,112.014 h1.52
  text "7" at 89.586,112.014 h1.52
  text "9" at 93.37,112.014 h1.52
  text "0" at 76.175,111.76 h1.52
  text "1" at 78.257,111.76 h1.52
  text "8" at 91.11,111.76 h1.52
  text "10" at 94.92,111.76 h1.52
  text "12" at 98.73,111.76 h1.52
  text "14" at 102.514,111.76 h1.52
  text "WLB v4.1" at 57.429,66.573 h1.52 r90
  text "KN2C / SSL / TEAM" at 65.43,52.73 h1.52